# EAGLE board SensorTile_Breakout (EAGLE 8.6.0)
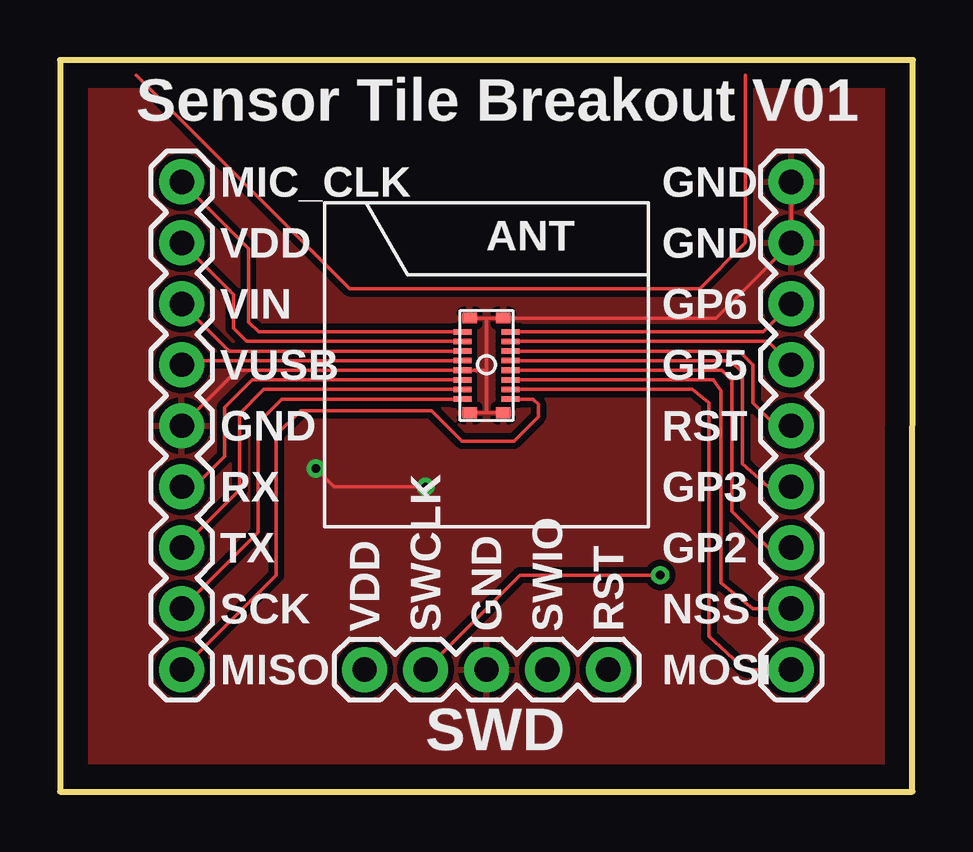
[diagram p0: board, top side]
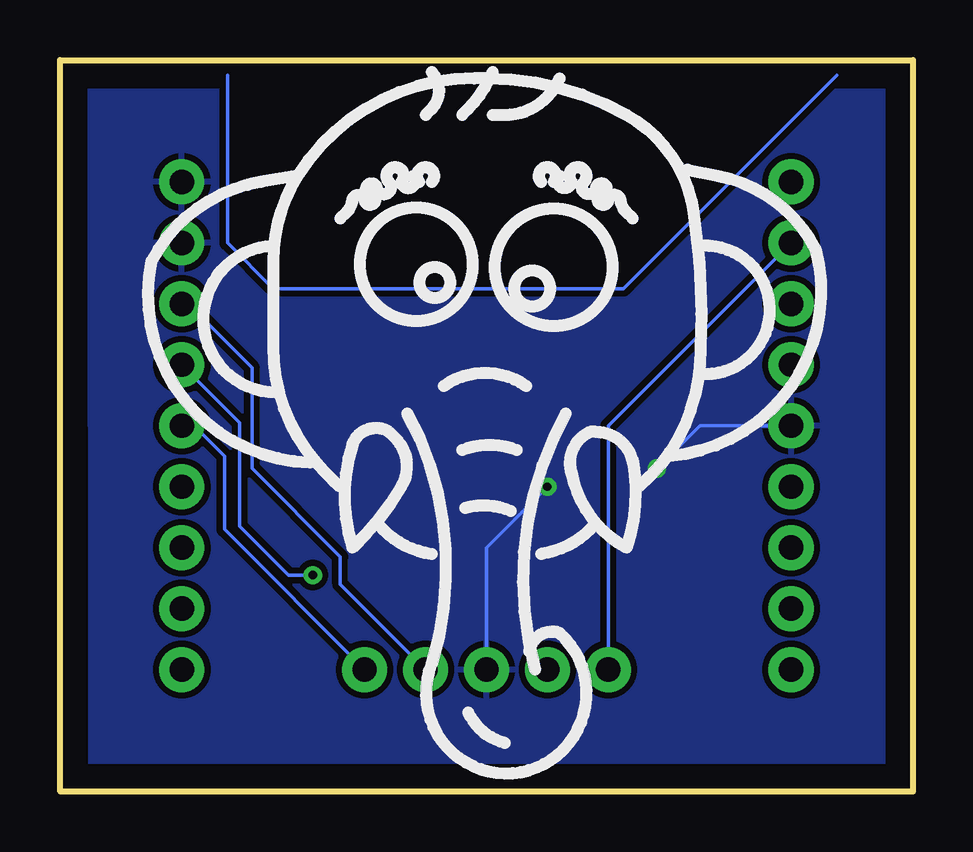
[diagram p1: board, bottom side, seen from below]

Size 35.56 x 30.48 mm. Coordinates in mm from the lower left corner, seen from the top.
Outline: 0,0 35.54,0 35.56,30.48 0,30.48 0,0
Copper layers (1*16): Top 0.035mm / dielectric 1.5mm / Bottom 0.035mm
Design rules "default": minimum track width 6mil, minimum drill 0.35mm, track to track 6mil, track to pad 6mil, pad to pad 6mil, via to via 6mil, smd to smd 6mil, copper to edge 40mil, drill to drill 6mil, minimum pad ring 10mil, minimum via ring 8mil, stop-mask expansion 4mil, vias tented up to drill 0mil, thermal gap 10mil

## Footprints (pad centres in the part's own frame; a part is rotated, then mirrored left to right if it is on the bottom)
1X09 = drill 1.016 pad 1.88: 1 0,0; 2 2.54,0; 3 5.08,0; 4 7.62,0; 5 10.16,0; 6 12.7,0; 7 15.24,0; 8 17.78,0; 9 20.32,0
1X05 = drill 1.016 pad 1.88: 1 0,0; 2 2.54,0; 3 5.08,0; 4 7.62,0; 5 10.16,0
BM10B(0.8)-16DP-0.4V(51) = smd 0.6 x 0.44: G$1 0.7,3.37; G$2 -0.7,3.37; G$3 0.7,-0.57; G$4 -0.7,-0.57 | smd 0.75 x 0.23: GND$1 -1,1.2; GPIO2 1,1.2; GPIO3 1,1.6; GPIO5 1,2.4; GPIO6 1,2.8; MIC_CLK -1,2.8; NRST 1,2; RXD -1,0.8; SPI_MISO 1,0; SPI_MOSI 1,0.4; SPI_NSS 1,0.8; SPI_SCK -1,0; TXD -1,0.4; VDD_1.8V -1,2.4; VIN_2-5V -1,2; VUSB_3.3V -1,1.6

## Placement (x,y rotation side)
J1  [1X09]  5.08,25.4 270 top
J2  [1X09]  30.48,25.4 270 top
SWD  [1X05]  12.7,5.08 0 top
U$1  BM10B  [BM10B(0.8)-16DP-0.4V(51)]  17.78,16.35 0 top

## Library data of the parts
J1 J2 SWD = SparkFun-Connectors
U$1 = BM10B(0.8)

## Nets
GND: J1.5 J2.1 J2.2 SWD.3 U$1.G$1 U$1.G$2 U$1.G$3 U$1.G$4 U$1.GND$1
GPIO2: J2.7 U$1.GPIO2
GPIO3: J2.6 U$1.GPIO3
MIC_CLK: J1.1 U$1.MIC_CLK
MISO: J1.9 U$1.SPI_MISO
MOSI: J2.9 U$1.SPI_MOSI
NSS: J2.8 U$1.SPI_NSS
RESET: J2.5 SWD.5 U$1.NRST
RX: J1.6 U$1.RXD
SCK: J1.8 U$1.SPI_SCK
SWDCLK: J2.4 SWD.2 U$1.GPIO5
SWDIO: J2.3 SWD.4 U$1.GPIO6
TX: J1.7 U$1.TXD
VDD: J1.2 SWD.1 U$1.VDD_1.8V
VIN: J1.3 U$1.VIN_2-5V
VUSB: J1.4 U$1.VUSB_3.3V

## Tracks (layer width: path | path; a pad name or v marks a point on that pad's centre or on a via)
GND  (via drill 0.35)
  Top 0.152: J1.5 7.39,17.55 U$1.GND$1 17.75,17.55 17.78,17.53 | U$1.G$2 17.78,19.72 | 17.78,19.72 U$1.G$1 27.34,19.72 J2.2 J2.1 | U$1.G$4 17.78,15.78 | 17.78,15.78 U$1.G$3 | 17.78,15.78 17.78,17.53 | 17.78,17.53 17.78,19.72 | v15.24,12.7 11.43,12.7 v10.67,13.46
  Bottom 0.152: SWD.3 17.78,10.16 v15.24,12.7 | v10.67,13.46 8.89,15.24 J1.5
  pour Bottom (isolate 0.254): 0.64,29.84 0.64,0.64 34.92,0.64 34.92,29.84
  pour Top (isolate 0.254): 0.64,29.84 0.64,0.64 34.92,0.64 34.92,29.84
GPIO2
  Top 0.152: U$1.GPIO2 27.6,17.55 28,17.14 28,11.68 29.53,10.16 J2.7
GPIO3
  Top 0.152: U$1.GPIO3 27.96,17.95 28.45,17.46 28.45,13.65 29.53,12.7 J2.6
MIC_CLK
  Top 0.152: U$1.MIC_CLK 8.28,19.15 7.87,19.56 7.87,22.61 J1.1
MISO
  Top 0.152: U$1.SPI_MISO 19.71,16.35 19.94,16.13 19.94,15.62 18.92,14.61 16.76,14.61 15.49,15.88 10.03,15.88 9.02,14.86 9.02,9.02 J1.9
MOSI
  Top 0.152: U$1.SPI_MOSI 26.36,16.75 27.05,16.19 27.05,6.48 28.57,5.08 J2.9
N$1
  Top 0.152: 3.17,29.84 12.06,20.95 26.67,20.95 28.57,22.86 28.57,29.84
N$2
  Bottom 0.152: 3.17,29.84 12.06,20.95 26.67,20.95 28.57,22.86 28.57,29.84
NSS
  Top 0.152: U$1.SPI_NSS 27.23,17.15 27.56,16.7 27.56,8.7 28.89,7.62 J2.8
RESET
  Top 0.152: U$1.NRST 28.32,18.35 28.89,17.78 28.89,16.19 29.84,15.24 J2.5
  Bottom 0.152: SWD.5 28.7,10.92 28.7,13.97 29.97,15.24 J2.5
RX
  Top 0.152: U$1.RXD 8.01,17.15 6.86,16 6.86,13.97 5.59,12.7 J1.6
SCK
  Top 0.152: U$1.SPI_SCK 9.24,16.35 8.26,15.37 8.26,10.79 J1.8
SWDCLK  (via drill 0.35)
  Top 0.152: U$1.GPIO5 29.51,18.75 J2.4 | v25.02,9.02 19.18,9.02 SWD.2
  Bottom 0.152: J2.4 28.07,15.37 28.07,11.05 26.04,9.02 v25.02,9.02
SWDIO
  Top 0.152: U$1.GPIO6 29.31,19.15 J2.3
  Bottom 0.152: SWD.4 23.88,8.64 23.88,9.78 27.56,13.46 27.56,17.65 30.23,20.32 J2.3
TX
  Top 0.152: U$1.TXD 8.5,16.75 7.49,15.75 7.49,12.57 J1.7
VDD
  Top 0.152: U$1.VDD_1.8V 7.79,18.75 7.24,19.3 7.24,20.7 J1.2
  Bottom 0.152: SWD.1 12.7,15.24 J1.2
VIN
  Top 0.152: U$1.VIN_2-5V 7.05,18.35 J1.3
VUSB
  Top 0.152: U$1.VUSB_3.3V 5.25,17.95 J1.4

## Text on the board
tPlace: Sensor Tile Breakout V01 | MIC_CLK | GND | ANT | VDD | GND | VIN | GP6 | VUSB | GP5 | GND | RST | RX | GP3 | TX | GP2 | SCK | VDD | SWCLK | GND | SWIO | RST | NSS | MISO | MOSI